# Altium PCB MEMS_LIP+Notch_PCB.PcbDoc
Units mm, origin at the board's own origin, x right, y up, seen from the top; angles counter-clockwise.
Board outline 40.4 x 63.06 mm, 2 copper layers (Top Layer, Bottom Layer), stack 0.695 mm thick; 31 components, 19 nets, 83 pads, 112 vias.
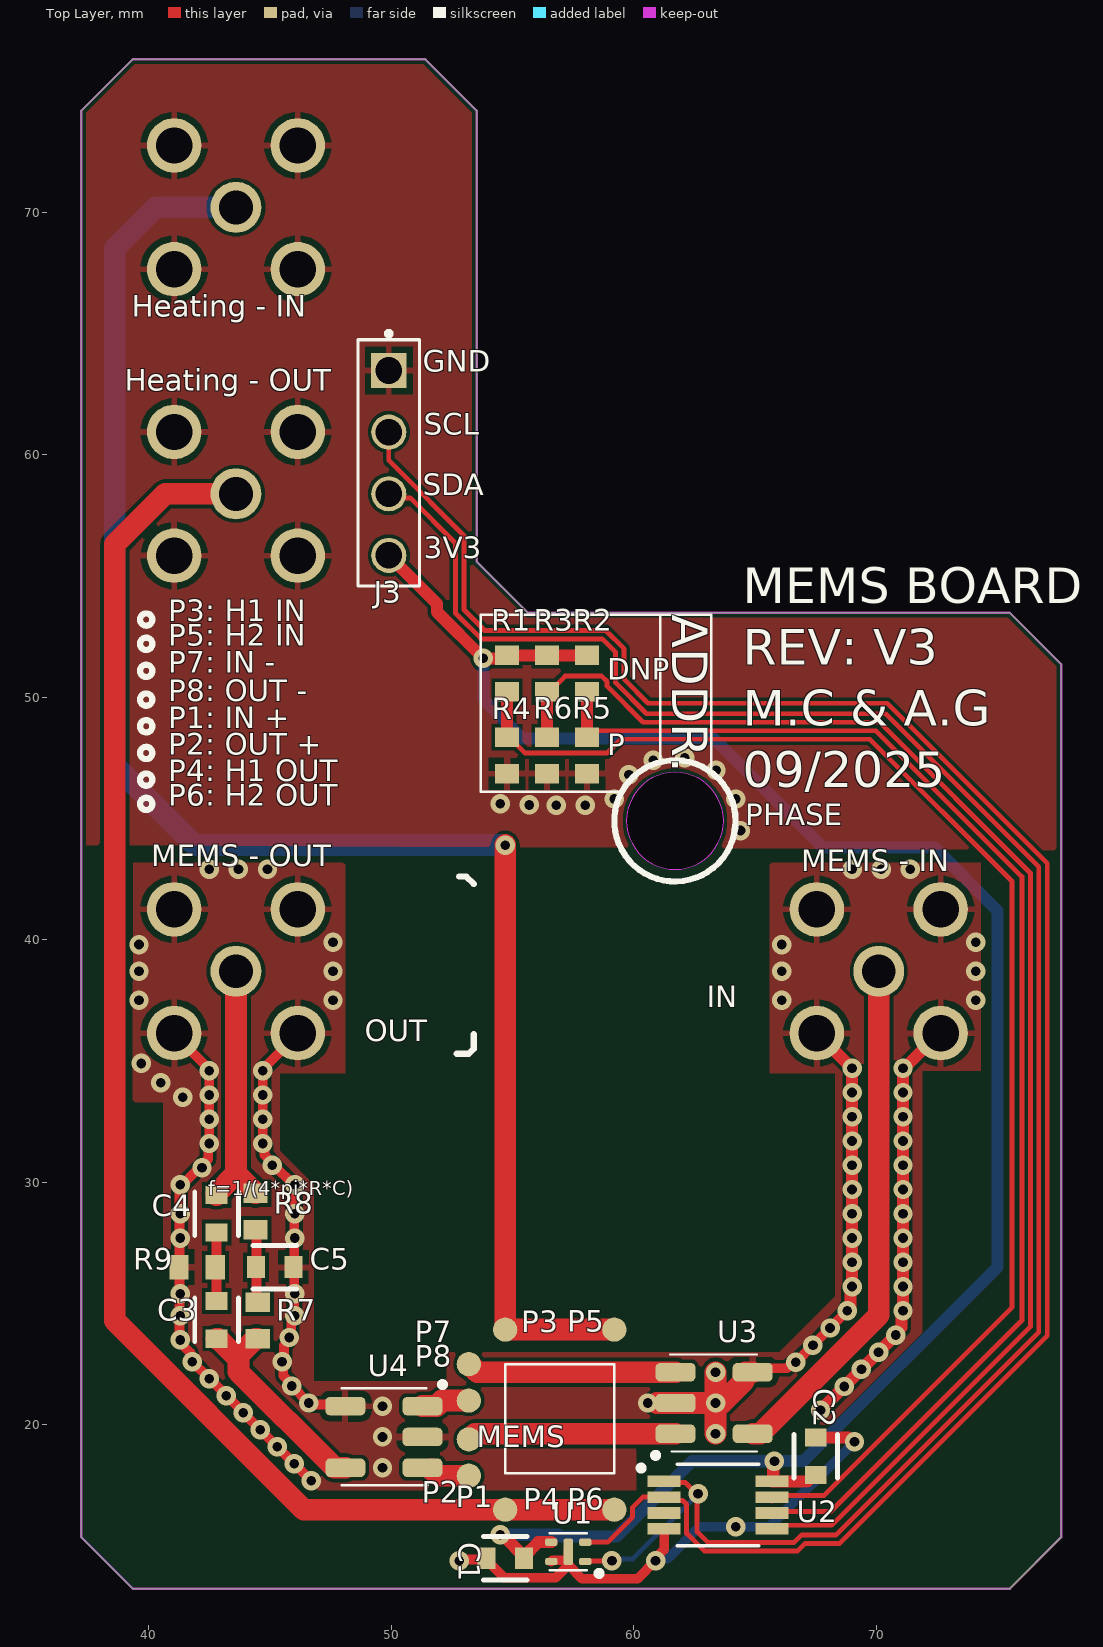
[diagram p0: Top Layer view]
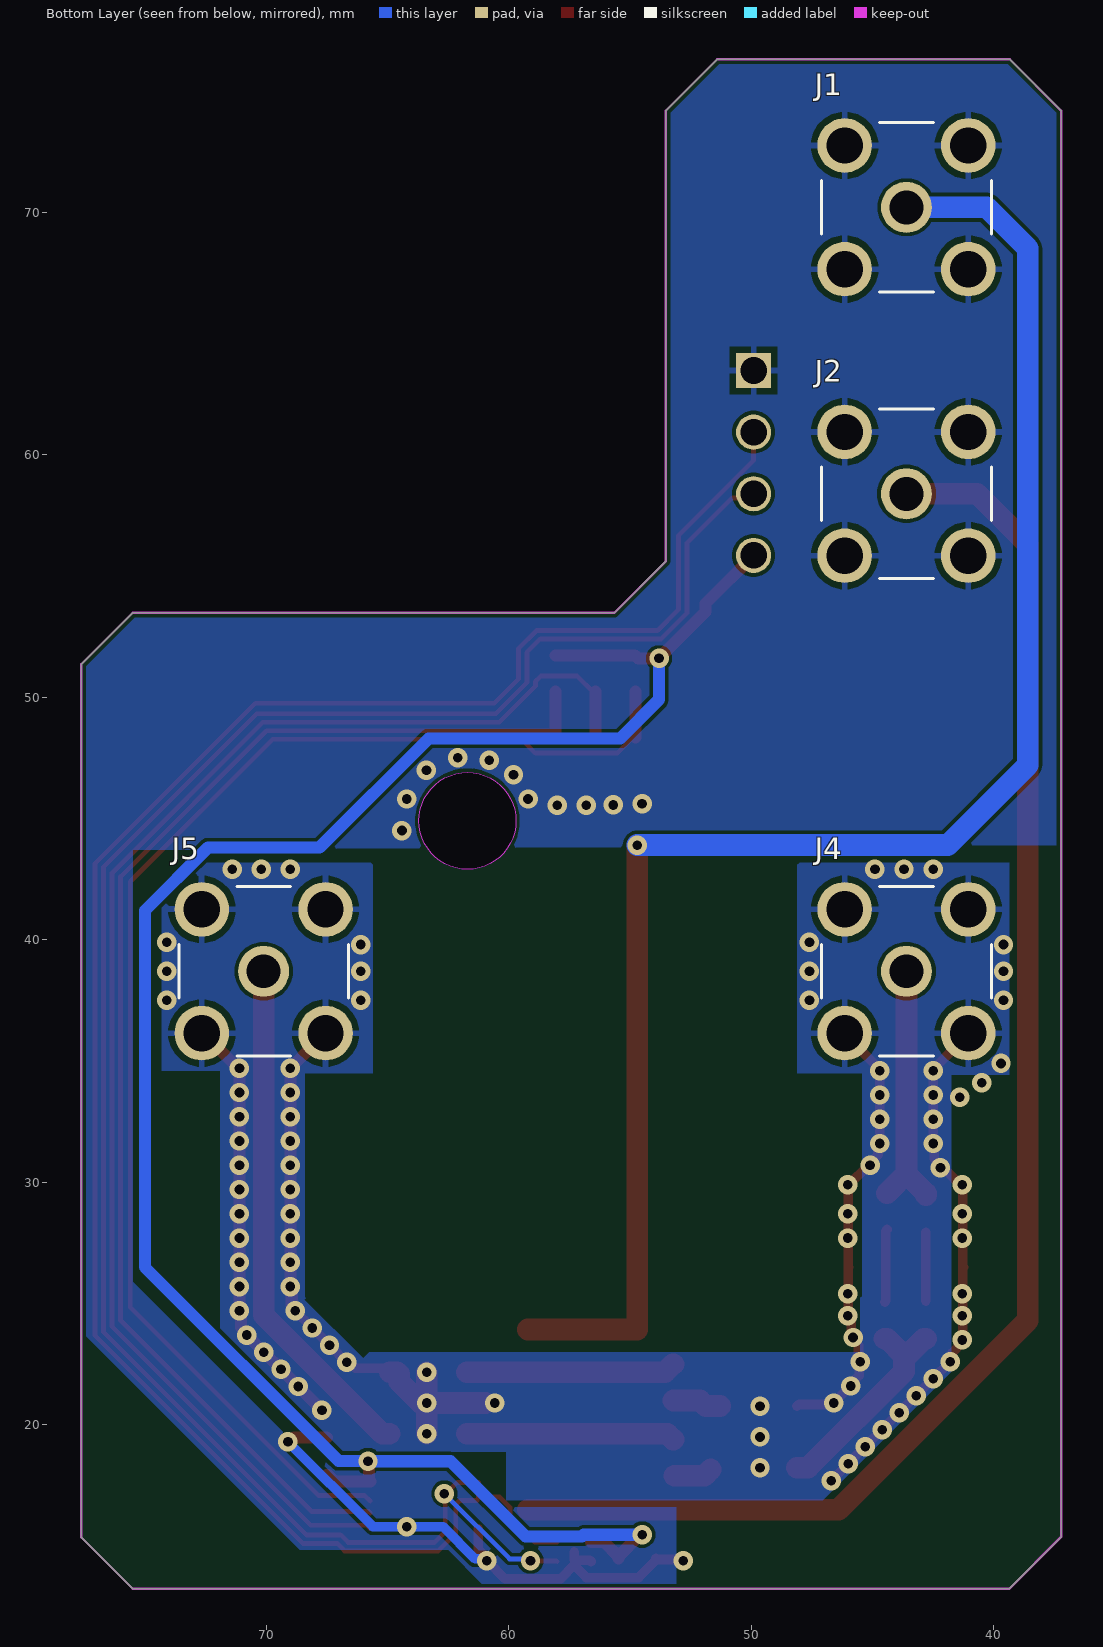
[diagram p1: Bottom Layer view, seen from below]
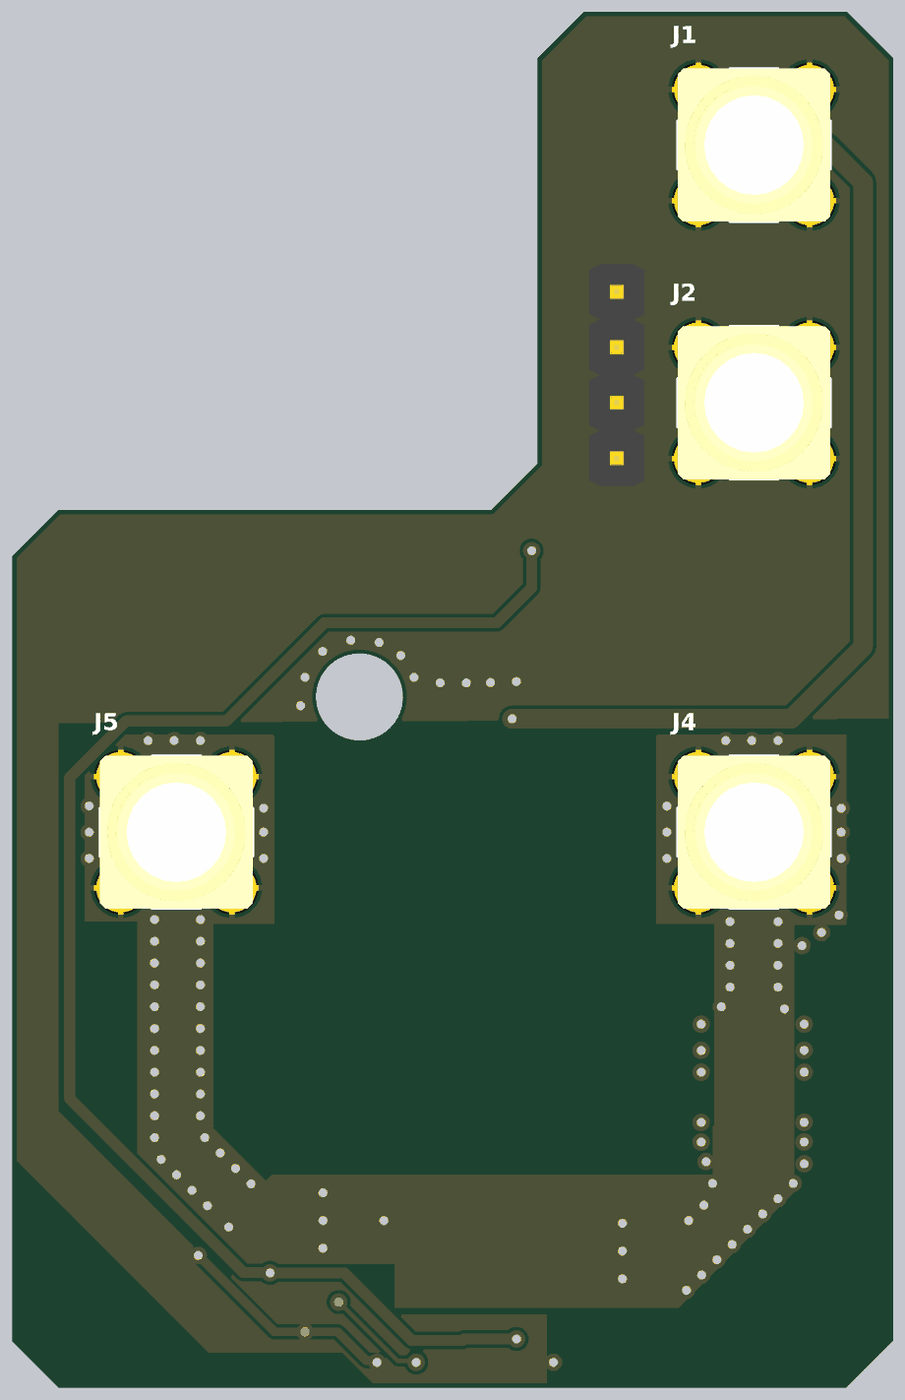
[diagram p2: 3D render of the assembled board from below, using the file's embedded part models]

## Layer stack, top to bottom
Top Solder: solder mask 0.0102, Solder Resist, Dk 3.5
Top Layer: signal copper 0.0152
Dielectric 1: dielectric 0.665, FR-4, Dk 4.8
Bottom Layer: signal copper 0.0152
Bottom Solder: solder mask 0.0102, Solder Resist, Dk 3.5

## Board outline
37.221,15.379 37.221,74.179 39.343,76.3 51.4,76.3 53.521,74.179 53.521,55.6 55.643,53.479 75.5,53.479 77.621,51.357 77.621,15.363 75.5,13.242 39.358,13.242
cut-out: 59.7,44.9 ccw(c61.7,44.9) 61.7,42.9 ccw(c61.7,44.9) 63.7,44.9 ccw(c61.7,44.9) 61.7,46.9 ccw(c61.7,44.9)

## Design rules (kind name [scope] priority, off if disabled: settings)
Clearance [All] p1: gap=0.15 ignorepadtopadclearanceinfootprint=FALSE
MinimumSolderMaskSliver [All] p1 off: minsoldermaskwidth=0.254
PolygonConnect [All] p1: thpad.connectstyle=Relief thpad.reliefconductorwidth=0.254 thpad.reliefentries=4 thpad.polygonreliefangle="90 Angle" thpad.airgapwidth=0.254 smdpad.connectstyle=Relief smdpad.reliefconductorwidth=0.254 smdpad.reliefentries=4 smdpad.polygonreliefangle="90 Angle" smdpad.airgapwidth=0.254 via.connectstyle=Direct via.reliefconductorwidth=0.254 via.reliefentries=4 via.polygonreliefangle="90 Angle" via.airgapwidth=0.254
RoutingVias [All] p1: holewidth=0.3 width=0.6 viastyle="Through Hole" minholewidth=0.2 minwidth=0.5 maxholewidth=0.711 maxwidth=1.27
SilkToSilkClearance [All] p1 off: silktosilkclearance=0.254
SilkToSolderMaskClearance [IsPad] p1 off: minsilkscreentomaskgap=0.254 clearancetoexposedcopper=TRUE
SolderMaskExpansion [All] p1: expansion=0.102 istentingtop=FALSE
SupplyNets "Schematic Supply Nets_1" [InNet('AGND')] p1: voltage=0.000
SupplyNets "Schematic Supply Nets_2" [InNet('GND')] p2: voltage=0.000
SupplyNets "Schematic Supply Nets" [InNet('3V3')] p3: voltage=0.000
Width [(InNet('MEMS_IN') OR InNet('MEMS_OUT') OR InNet('MEMS_IN_D_N') OR InNet('MEMS_IN_D_P') OR InNet('MEMS_OUT_D_N') OR InNet('MEMS_OUT_D_P'))] p1: maxlimit=1.154 minlimit=0.9 preferedwidth=1.154 impedanceprofiledriven=TRUE impedanceprofileid={71C03835-4AAD-4EFE-88B4-1C130F7F27B0} impedanceprofilevalue=50.000000 minimp=50.000000 maximp=50.000000 favimp=50.000000
Width Width_1 [All] p2: maxlimit=1 minlimit=0.1 preferedwidth=0.2
27 further rules are at their usual default settings.

## Components (designator, comment, footprint, x,y, rotation, side; value= is the part's Value field where it differs from the comment)
C1 "CL10E104KC8VPNC" C0603 54.7,14.5 r180 top value=100nF
C2 "CL10E104KC8VPNC" C0603 67.5,18.7 r90 top value=100nF
C3 "C0603C270J5GACTU" C0603 42.8,24.325 r90 top value=27pF
C4 "C0603C270J5GACTU" C0603 42.8,28.7 r270 top value=27pF
C5 "C0603C270J5GACTU" C0603 45.2,26.5 r0 top value=27pF
J1 "CONSMA001-G" CONSMA001-G 43.6,70.196 r180 bottom locked
J2 "CONSMA001-G" CONSMA001-G 43.6,58.385 r180 bottom locked
J3 "61300411121" WURTH_61300411121 49.9,59.655 r270 top
J4 "CONSMA001-G" CONSMA001-G 43.6,38.7 r180 bottom locked
J5 "CONSMA001-G" CONSMA001-G 70.1,38.7 r180 bottom locked
P1 "MEMS_PAD" MEMS_PAD 53.2,19.4 r0 top
P2 "MEMS_PAD" MEMS_PAD 53.2,17.9 r0 top
P3 "MEMS_PAD" MEMS_PAD 54.7,23.927 r0 top
P4 "MEMS_PAD" MEMS_PAD 54.7,16.5 r0 top
P5 "MEMS_PAD" MEMS_PAD 59.2,23.927 r0 top
P6 "MEMS_PAD" MEMS_PAD 59.2,16.5 r0 top
P7 "MEMS_PAD" MEMS_PAD 53.2,22.5 r0 top
P8 "MEMS_PAD" MEMS_PAD 53.2,21 r0 top
R1 "RMCF0603ZT0R00" R0603 54.771,50.971 r90 top value=0R
R2 "RMCF0603ZT0R00" R0603 58.073,50.971 r90 top value=0R
R3 "RMCF0603ZT0R00" R0603 56.422,50.971 r90 top value=0R
R4 "RMCF0603ZT0R00" R0603 54.771,47.596 r90 top value=0R
R5 "RMCF0603ZT0R00" R0603 58.073,47.596 r90 top value=0R
R6 "RMCF0603ZT0R00" R0603 56.422,47.596 r90 top value=0R
R7 "RMCF0603ZT0R00" R0603 44.5,24.3 r270 top value=0R
R8 "RMCF0603ZT0R00" R0603 44.4,28.8 r270 top value=0R
R9 "RMCF0603ZT0R00" R0603 42,26.5 r180 top value=0R
U1 "STS4L-AD1B-R3" STS4L-AD1B-R3 57.3,14.762 r180 top
U2 "P3T1755DPZ" TSSOP8_P3T1755DPZ_NXP 63.479,16.694 r0 top
U3 "TC1-1-13MX+" TC1-1-13MX+ 63.313,20.9 r90 top
U4 "TC1-1-13MX+" TC1-1-13MX+ 49.7,19.5 r270 top

## Footprints (in the part's own frame and the unit in brackets; to place one, negate y for a bottom-side part, rotate by r counter-clockwise, add the part's x,y. Pads: shape width x height; smd on the part's side, far side on the other; paste and mask are expansions set on the pad)
C0603 [mm]
  rect 0.75x0.9 smd paste+0 mask+0: 1(-0.775,0) 2(0.775,0)
  silkscreen extent -0.9,-0.9 0.9,0.9, body extent -1.25,-0.6 1.25,0.6, height 0.25
CONSMA001-G [mm]
  round 2.1 hole 1.4: 1(0,0)
  round 2.25 hole 1.5: S1(-2.55,2.55) S2(-2.55,-2.55) S3(2.55,-2.55) S4(2.55,2.55)
  silkscreen extent -3.5,-3.5 3.5,3.5, body extent -3.51,-3.51 3.51,3.51, height 9.78
MEMS_PAD [mm]
  round 1 smd: 1(0,0)
R0603 [mm]
  rect 0.8x1 smd: 1(-0.75,0) 2(0.75,0)
  body extent -0.85,-0.45 0.85,0.45, height 0.55
STS4L-AD1B-R3 [mm]
  rrect50% 0.5x0.3 smd: 1(-0.7,0.4) 2(-0.7,-0.4) 3(0.7,-0.4) 4(0.7,0.4)
  rrect50% 0.4x1.1 smd: GND(0,0)
  silkscreen extent -1.37,-0.76 0.76,0.99, body extent -0.75,-0.75 0.75,0.75, height 0.55
TC1-1-13MX+ [mm]
  rrect50% 0.76x1.65 smd: 1(-1.27,1.59) 2(0,1.59) 3(1.27,1.59) 4(-1.27,-1.59) 6(1.27,-1.59)
  silkscreen extent -2.26,-1.75 2,2.51, body extent -1.95,-1.91 1.91,1.94, height 4.06
TSSOP8_P3T1755DPZ_NXP [mm]
  rect 1.356x0.483 smd paste+0 mask+0: 1(-2.227,0.975) 2(-2.227,0.325) 3(-2.227,-0.325) 4(-2.227,-0.975) 5(2.228,-0.975) 6(2.228,-0.325) 7(2.228,0.325) 8(2.228,0.975)
  silkscreen extent -3.27,-1.68 1.68,1.68, body extent -2.55,-1.55 2.55,1.55, height 1.09
WURTH_61300411121 [mm]
  rect 1.45x1.45 / inner round 1.45 / far side rect 1.45x1.45 hole 1.1: 1(-3.81,0)
  round 1.45 hole 1.1: 2(-1.27,0) 3(1.27,0) 4(3.81,0)
  silkscreen extent -5.43,-1.27 5.08,1.27, body extent -5.08,-1.27 5.08,1.27, height 7.27

## Part data
C1 C2: "CAP CER 100NF 100V X8L 0603", Case=0603, Manufacturer=Samsung, Supplier Part Number=1276-CL10E104KC8VPNCCT-ND, Supplier Part Number 1=187-CL10E104KC8VPNC, Manufacturer Part Number=CL10E104KC8VPNC, Pricing="1=0.27, 10=0.155, 50=0.1104, 100=0.0966, 500=0.07306, 1000=0.06573 (USD)", RoHS=No, Stock=47712, Supplier=Digikey, Supplier 1=Mouser
C3 C4 C5: "CAP CER 27PF 50V C0G/NP0 0603", Supplier Part Number 1=53M7200, Packaging=0603, Supplier 1=Newark
J1 J2 J4 J5: "CONN SMA RCPT STR 50 OHM PCB"
J3: "CONN HEADER VERT 4POS 2.54MM", Package=None, Supplier Part Number 1=20X0951, Check_prices=https://www.snapeda.com/parts/61300411121/W%25C3%25BCrth+Elektronik+Midcom/view-part/?ref=eda, MF="WÃ¼rth Elektronik", MP=61300411121, SnapEDA_Link=https://www.snapeda.com/parts/61300411121/W%25C3%25BCrth+Elektronik+Midcom/view-part/?ref=snap, Supplier 1=Newark
P1 P2 P3 P4 P5 P6 P7 P8: "PAD MEMS connection"
R1 R2 R3 R4 R5 R6 R7 R8 R9: "RES 0 OHM JUMPER 1/10W 0603", Package=0603, Supplier Part Number 1=RMCF0603ZT0R00CT-ND, Check_prices=https://www.snapeda.com/parts/RMCF0603ZT0R00/Stackpole+Electronics+Inc/view-part/?ref=eda, MF="Stackpole Electronics", MP=RMCF0603ZT0R00, SnapEDA_Link=https://www.snapeda.com/parts/RMCF0603ZT0R00/Stackpole+Electronics+Inc/view-part/?ref=snap, Supplier 1=DigiKey
U1: "IC - TEMPERATURE SENSOR 4-DFN", Supplier Part Number 1=1649-STS4L-AD1B-R3CT-ND, Supplier 1=DigiKey
U2: "SENSOR DGTL -40C ~ 125C 8-TSSOP", Supplier Part Number 1=568-P3T1755DPZCT-ND, Supplier 1=DigiKey
U3 U4: "1:1 CORE & WIRE TRANSFORMER, 4.5"

## Via types
v1: diameter 0.8, hole 0.4, Top Layer to Bottom Layer, tented both sides, 112 vias

## Nets (pads, with @x,y where several pads share a name; then routed paths per layer and width w, separated by ;. In a path a pad name is that pad's centre, name@x,y a point inside that pad or via, vN(x,y) a via of type N, cw(c..) or ccw(c..) an arc to the next point about the centre after c; other vN are vias at no path point)
3V3: C1.1 C2.1 J3.4 R1.2 R2.2 R3.2 U1.3 U2.8 | length 82.1
  Top Layer w0.5: J3.4 51.892,53.853 51.892,53.508 v1(53.8,51.6) 54.671,51.6 54.792,51.721 R3.2 R2.2 ; v1(54.494,15.47) 54.551,15.413 54.637,15.413 C1.1@55.475,14.575 ; C1.1 C1.1@55.475,14.575 ; U1.3 56.062,15.162 C1.1@55.475,14.575 ; U2.8 67.169,17.669 67.425,17.925 C2.1 ; U2.8@65.745,17.669 65.753,17.677 65.753,18.453 v1(65.8,18.5)
  Bottom Layer w0.5: v1(53.8,51.6) 53.8,49.9 55.4,48.3 63.3,48.3 67.8,43.8 72.4,43.8 75,41.2 75,26.5 67.013,18.513 65.813,18.513 v1(65.8,18.5) 62.4,18.5 59.3,15.4 56.973,15.4 56.902,15.47 v1(54.494,15.47)
AGND: C5.2 J4.S1 J4.S2 J4.S3 J4.S4 J5.S1 J5.S2 J5.S3 J5.S4 R9.2 U3.2 U3.6 U4.2 U4.4 | length 82.7
  Top Layer w0.4: J4.S3 41.05,36.1 42.5,34.65 v1(42.5,34.6) v1(42.5,33.6) v1(42.5,32.6) v1(42.5,31.6) 42.451,31.551 42.451,30.96 42.2,30.708 v1(42.2,30.6) 42.1,30.6 41.4,29.9 v1(41.3,29.9) 41.275,29.875 41.275,26.525 R9.2 41.275,26.475 41.275,23.525 v1(41.3,23.5) 41.3,23.392 41.723,22.968 41.723,22.677 v1(41.8,22.6) v1(42.5,21.9) v1(45.3,19.1) v1(46.7,17.7) ; J4.S2 46.15,36.1 44.7,34.65 v1(44.7,34.6) v1(44.7,33.6) v1(44.7,32.6) v1(44.7,31.6) 44.777,31.523 44.777,31.132 45.1,30.808 v1(45.1,30.7) 45.163,30.7 45.963,29.9 v1(46.025,29.9) 46,29.875 46,26.525 C5.2 46,26.475 46,24.367 45.877,24.243 45.877,23.677 v1(45.8,23.6) 45.8,23.492 45.577,23.268 45.577,22.677 v1(45.5,22.6) 45.549,22.551 45.549,22.034 45.9,21.683 v1(45.9,21.6) v1(46.6,20.9) 46.665,20.835 48.045,20.835 U4.4 ; U3.6 65.069,22.336 66.328,22.336 66.57,22.579 v1(66.679,22.579) v1(67.386,23.286) v1(68.093,23.993) v1(68.8,24.7)
  Top Layer w0.5: J5.S3 v1(69,34.7) v1(69,33.7) v1(69,32.7) v1(69,31.7) v1(69,30.7) v1(69,29.7) v1(69,28.7) v1(69,27.7) v1(69,26.7) v1(69,25.7) 68.943,25.643 68.943,24.924 68.8,24.781 v1(68.8,24.7) ; v1@67.623,20.523 v1(67.7,20.6) v1(68.679,21.579) v1(69.386,22.286) v1(70.093,22.993) v1(70.8,23.7) 70.8,23.781 71.043,24.024 71.043,24.643 v1(71.1,24.7) v1(71.1,25.7) v1(71.1,26.7) v1(71.1,27.7) v1(71.1,28.7) v1(71.1,29.7) v1(71.1,30.7) v1(71.1,31.7) v1(71.1,32.7) v1(71.1,33.7) v1(71.1,34.7) 71.15,34.7 72.6,36.15 J5.S2
  Top Layer w0.9: U3.2@60.961,20.9 U3.2 v1(63.374,20.9) ; v1(63.374,19.63) v1(63.374,20.9) ; v1(63.374,22.17) v1(63.374,20.9) ; U3.6 64.598,22.17 64.528,22.1 64.528,21.795 63.633,20.9 v1(63.374,20.9)
  other v1: 49.639,18.23 46,18.4 49.639,19.5 44.6,19.8 43.9,20.5 49.639,20.77 60.58,20.9 43.2,21.2 41.3,24.5 46.025,24.5 41.3,25.4 46.025,25.4 41.3,27.7 46.025,27.7 41.3,28.7 46.025,28.7 41.4,33.5 40.5,34.1 39.7,34.9 39.6,37.5 47.6,37.5 66.1,37.5 74.1,37.5 39.6,38.7 47.6,38.7 66.1,38.7 74.1,38.7 39.6,39.8 66.1,39.8 47.6,39.9 74.1,39.9 42.5,42.9 43.7,42.9 44.9,42.9 69,42.9 70.2,42.9 71.4,42.9
GND: C1.2 C2.2 J1.S1 J1.S2 J1.S3 J1.S4 J2.S1 J2.S2 J2.S3 J2.S4 J3.1 R4.1 R5.1 R6.1 U1.4 U1.GND U2.4 | length 23.8
  Top Layer w0.2: U1.4 U1.4@56.625,14.387 ; U1.GND@57.275,14.387 U1.GND@57.3,14.412
  Top Layer w0.4: v1(52.8,14.4) 52.85,14.45 53.875,14.45 C1.2 53.925,14.425 54.65,13.7 56.789,13.7 57.3,14.211 57.861,13.65 60.15,13.65 v1(60.9,14.4) 60.9,14.508 61.252,14.86 U2.4 ; U1.4 56.65,14.412 57.3,14.412 U1.GND
  Top Layer w0.5: C2.2 68.844,19.475 69.019,19.3 v1(69.1,19.3)
  Bottom Layer w0.4: v1(60.9,14.4) 60.977,14.477 61.383,14.477 62.707,15.8 v1(64.2,15.8) 65.6,15.8 v1(69.1,19.3)
  other v1: 64.4,44.5 56.8,45.546 58,45.546 55.692,45.558 54.5,45.6 59.2,45.8 64.2,45.8 59.8,46.8 63.39,46.99 60.8,47.4 62.1,47.5
HEATING_IN: J1.1 P3.1 P5.1 | length 68.9
  Top Layer w0.9: v1(54.7,43.9) P3.1 P5.1
  Bottom Layer w0.9: J1.1 40.296,70.196 38.6,68.5 38.6,47.2 41.9,43.9 v1(54.7,43.9)
HEATING_OUT: J2.1 P4.1 P6.1 | length 61.7
  Top Layer w0.9: J2.1 40.685,58.385 38.6,56.3 38.6,24.3 46.4,16.5 P4.1 P6.1
MEMS_IN: J5.1 U3.4 | length 21.4
  Top Layer w0.9: U3.4 65.208,19.63 70.1,24.522 J5.1
MEMS_IN_D_N: P7.1 U3.3 | length 8.7
  Top Layer w0.9: P7.1 53.227,22.5 53.557,22.17 U3.3
MEMS_IN_D_P: P1.1 U3.1 | length 8.6
  Top Layer w0.9: P1.1 53.227,19.4 53.457,19.63 U3.1
MEMS_OUT: C4.1 J4.1 R8.1 | length 10.7
  Top Layer w0.9: C4.1 42.8,29.55 43.6,30.35 ; J4.1 43.6,30.35 ; R8.1 44.35,29.6 43.6,30.35
MEMS_OUT_D_N: P8.1 U4.1 | length 2
  Top Layer w0.9: U4.1 51.87,20.77 52.1,21 P8.1
MEMS_OUT_D_P: P2.1 U4.3 | length 1.6
  Top Layer w0.9: U4.3@51.665,18.16 51.925,17.9 P2.1@53.173,17.9
MEMS_OUT_RAW: C3.1 R7.2 U4.6 | length 9
  Top Layer w0.9: C3.1 42.875,23.55 43.7,22.725 ; R7.2 44.4,23.55 43.7,22.85 43.7,22.725 ; U4.6 47.665,18.23 43.7,22.195 43.7,22.725
NetC3_2: C3.2 C4.2 R9.1 | length 2.8
  Top Layer w0.4: C3.2 C4.2
NetC5_1: C5.1 R7.1 R8.2 | length 3
  Top Layer w0.4: R8.2 44.45,28 44.45,25.1 R7.1
NetR1_1: R1.1 R4.2 U2.7 | length 56.4
  Top Layer w0.2: R4.2 54.871,48.346 55.521,47.696 58.896,47.696 59.467,48.267 69.733,48.267 75.6,42.4 75.6,24.846 67.837,17.084 65.931,17.084 U2.7@65.708,16.86
  Top Layer w0.5: R4.2 R1.1
NetR2_1: R2.1 R5.2 U2.6 | length 54.3
  Top Layer w0.2: R5.2 58.344,48.617 69.983,48.617 76,42.6 76,24.3 68.126,16.426 65.765,16.426 U2.6
  Top Layer w0.5: R5.2 R2.1
NetR3_1: R3.1 R6.2 U2.5 | length 58.3
  Top Layer w0.2: R3.1 56.522,50.221 57.172,50.871 58.677,50.871 58.9,50.648 58.9,50.448 60.381,48.967 70.133,48.967 76.35,42.75 76.35,24.05 68.16,15.86 65.848,15.86 U2.5
  Top Layer w0.5: R6.2 R3.1
SCL: J3.2 U1.2 U2.2 | length 82.4
  Top Layer w0.2: J3.2 49.9,59.764 50.164,59.5 53,56.664 53,53.602 53.852,52.75 58.845,52.75 59.6,51.995 59.6,50.738 60.588,49.75 70.445,49.75 77.05,43.145 77.05,23.676 68.488,15.113 67.993,15.113 67.076,15.113 66.762,14.8 62.905,14.8 62.18,15.525 62.18,16.713 62.034,16.86 62.016,16.877 61.313,16.877 U2.2@61.304,16.886 ; U1.2 58.923,15.162 59.95,16.189 59.95,16.6 60.369,17.019 U2.2
SDA: J3.3 U1.1 U2.1 | length 81.6
  Top Layer w0.2: J3.3 50.067,58.218 50.782,58.218 52.65,56.35 52.65,53.457 53.707,52.4 58.7,52.4 59.25,51.85 59.25,50.593 60.526,49.317 70.383,49.317 76.7,43 76.7,23.821 68.343,15.463 66.931,15.463 66.617,15.15 63.05,15.15 62.614,15.586 v1@62.614,17.126 ; U1.1 58.019,14.381 59.081,14.381 v1(59.1,14.4) ; U2.1@61.248,17.627 62.113,17.627 62.578,17.161 62.614,17.161 v1(62.651,17.161)
  Bottom Layer w0.2: v1(59.1,14.4) 59.172,14.472 59.962,14.472 v1(62.651,17.161)
pads on no net: U2.3

## Polygon pours and split planes (outlines as drawn)
AGND on Bottom Layer "AGND_L02_P007" (solid, pour order 7): 71.9,28.692 71.9,31.7 71.9,34.6 74.3,34.6 74.3,43.179 37.221,43.179 37.231,26.588 46.785,16.892 60.1,16.892 60.1,18.9 67,18.9 71.9,23.8
GND on Bottom Layer "GND_L02_P008" (solid, pour order 8): 60.9,16.6 53.1,16.6 53.1,13.242 77.621,13.242 77.621,44.5 75.5,44.5 75.5,25.9 68.1,18.5 60.9,18.5
GND on Bottom Layer "GND_L02_P006" (solid, pour order 6): 37.221,43.905 37.221,74.179 39.343,76.3 51.4,76.3 53.521,74.179 53.521,55.6 55.643,53.479 75.5,53.479 77.621,51.357 77.621,43.69
GND on Top Layer "GND_L01_P009" (solid, pour order 9): 37.221,43.905 37.221,74.179 39.343,76.3 51.4,76.3 53.521,74.179 53.521,55.6 55.643,53.479 75.5,53.479 77.621,51.357 77.621,43.69
AGND on Top Layer "AGND_L01_P010" (solid, pour order 10): 71.9,28.692 71.9,31.7 71.9,34.6 74.3,34.6 74.3,43.179 39.358,43.179 39.343,24.334 46.376,17.3 60.1,17.3 60.1,18.9 67,18.9 71.9,23.8

## Keep-outs
Keep-Out Layer:
  lines w0.1: 37.221,15.379 37.221,33.379 37.221,74.179 39.343,76.3 51.4,76.3 53.521,74.179 53.521,55.6 55.643,53.479 75.5,53.479 77.621,51.357 77.621,33.363 77.621,15.363 75.5,13.242 39.358,13.242 37.221,15.379

## Other copper
Top Layer:
  pour cut-out: 37.221,16.9 40.596,16.9 40.596,33.3 37.221,33.3
  pour cut-out: 45.4,31.3 46.8,29.9 46.8,21.8 52.3,21.8 52.3,23 66,23 68.3,25.3 68.3,34.5 65.6,34.5 65.6,43.1 48.1,43.1 48.1,34.5 45.4,34.5
Bottom Layer:
  pour cut-out: 37.221,25.639 39.358,25.639 39.358,43.179 37.221,43.179
  pour cut-out: 48.1,43.1 48.1,33.9 65.6,33.9 65.6,43.1
  pour cut-out: 37.221,16.9 41.758,16.9 41.758,34.439 37.221,34.439
  pour cut-out: 60.903,13.242 66.323,13.242 68.1,13.242 77.621,13.242 77.561,23.789 68.611,14.839 62.5,14.839
  pour cut-out: 68.418,25.163 66.842,26.739 64.423,24.319 65.999,22.743
  pour cut-out: 66,23 66,25.229 45.497,25.229 45.497,23
  pour cut-out: 45.421,34.5 45.421,25.3 68.4,25.3 68.4,34.5
  pour cut-out: 45.136,13.636 47.722,16.222 40.222,23.722 37.636,21.136

## Silkscreen, mask and mechanical layers (free items; w line width, h text height)
Top Overlay:
  circle w0.254: c39.9,46.6 r0.254
  circle w0.254: c39.9,45.6 r0.254
  circle w0.254: c39.9,52.2 r0.254
  circle w0.254: c39.9,53.2 r0.254
  circle w0.254: c39.9,47.7 r0.254
  circle w0.254: c39.9,48.8 r0.254
  circle w0.254: c39.9,49.9 r0.254
  circle w0.254: c39.9,51.085 r0.254
  circle w0.254: c61.7,44.9 r2.5
  lines w0.1: 59.5,46.1 53.7,46.1 53.7,53.4 61.1,53.4 ; 61.1,47.3 61.1,53.4 ; 63.2,46.9 63.2,53.4 61.1,53.4 ; 54.7,18 59.2,18 59.2,22.5 54.7,22.5 54.7,18
  lines w0.254: 52.7,35.3 53.2,35.3 53.4,35.5 53.4,36.1 ; 52.8,42.6 53.1,42.6 53.4,42.3
  text "Heating - IN" at 39.3,65.367 h1.52
  text "GND" at 51.3,63.115 h1.52
  text "Heating - OUT" at 39.008,62.319 h1.52
  text "SCL" at 51.339,60.515 h1.52
  text "SDA" at 51.301,58.015 h1.52
  text "3V3" at 51.346,55.413 h1.52
  text "ADDR." at 61.1,53.4 h2.52 r270
  text "P3: H1 IN" at 40.8,52.815 h1.52
  text "P5: H2 IN" at 40.8,51.815 h1.52
  text "P7: IN -" at 40.8,50.7 h1.52
  text "DNP" at 58.9,50.4 h1.52
  text "P8: OUT -" at 40.8,49.515 h1.52
  text "P1: IN +" at 40.8,48.415 h1.52
  text "P2: OUT +" at 40.8,47.315 h1.52
  text "P" at 58.9,47.3 h1.52
  text "P4: H1 OUT" at 40.8,46.215 h1.52
  text "MEMS BOARD / REV: V3 / M.C & A.G / 09/2025" at 64.5,45.8 h2.52
  text "P6: H2 OUT" at 40.8,45.215 h1.52
  text "PHASE" at 64.6,44.414 h1.52
  text "MEMS - OUT" at 40.1,42.715 h1.52
  text "MEMS - IN" at 66.9,42.515 h1.52
  text "IN" at 63,36.9 h1.52
  text "OUT" at 48.9,35.514 h1.52
  text "f=1/(4*pi*R*C)" at 42.466,29.263 h1
  text "MEMS" at 53.535,18.763 h1.52
Mechanical 1:
  circle w0.254: c61.7,44.9 r2
  lines w0.1: 43.6,23.7 43.6,38.7 ; 53.931,20.21 59.931,20.21 ; 56.931,17.21 56.931,23.21 ; 70.1,23.7 70.1,38.7 ; 53.931,17.21 59.931,17.21 59.931,23.21 53.931,23.21 53.931,17.21 ; 54.673,17.966 59.173,17.966 59.173,22.466 54.673,22.466 54.673,17.966 ; 59.2,43.7 59.2,48.5 62.7,48.5 62.7,43.7 59.2,43.7
  lines w0.254: 43.6,38.7 70.1,38.7